# Altium PCB PCB1.PcbDoc (part 2 of 2)
Units mm, origin at the board's own origin, x right, y up, seen from the top; angles counter-clockwise.
Board outline 100 x 100 mm, 2 copper layers (Top Layer, Bottom Layer); 16 components, 62 nets, 154 pads, 23 vias.
Unrouted connection lines stored in the file: 17.
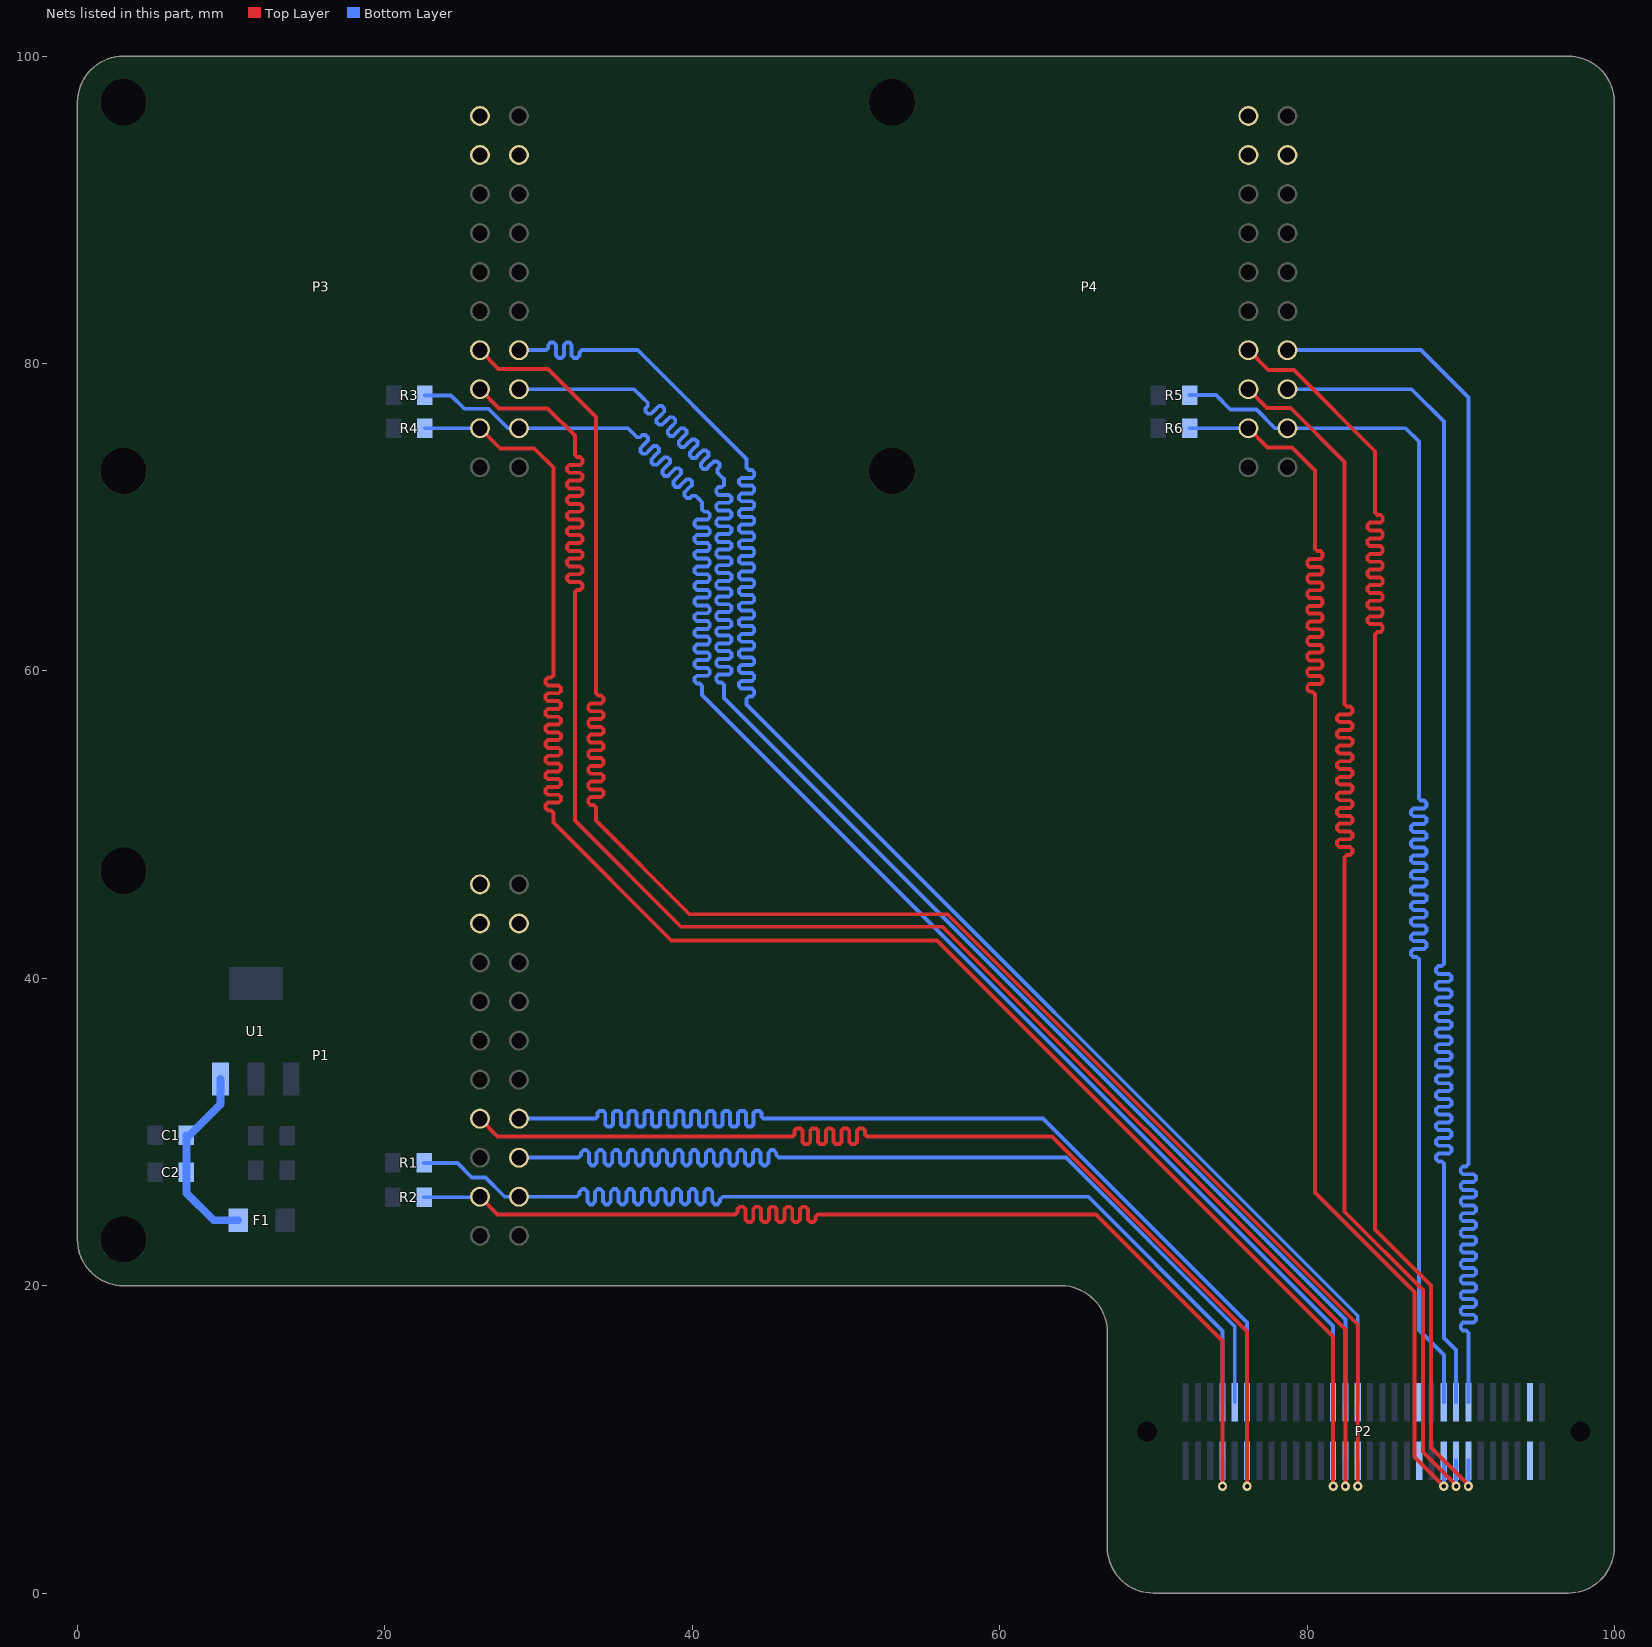
[diagram p2: the nets of this part, all layers, seen from the top]

## Via types
v1: diameter 0.6, hole 0.3, Top Layer to Bottom Layer, 21 vias
v2: diameter 3, hole 3, Top Layer to Bottom Layer, 2 vias

## Nets (pads, with @x,y where several pads share a name; then routed paths per layer and width w, separated by ;. In a path a pad name is that pad's centre, name@x,y a point inside that pad or via, vN(x,y) a via of type N, cw(c..) or ccw(c..) an arc to the next point about the centre after c; other vN are vias at no path point) (continued)
HS_2: P2.28 P3.6 | length 122
  Top Layer w0.254: P3.6@26.187,78.331 27.43,77.089 30.582,77.089 32.36,75.311 32.36,74.168 32.36,74.066 32.512,73.914 32.707,73.914 32.86,73.762 32.86,73.558 32.707,73.406 32.36,73.406 32.012,73.406 31.86,73.254 31.86,73.05 32.012,72.898 32.36,72.898 32.707,72.898 32.86,72.746 32.86,72.542 32.707,72.39 32.36,72.39 32.012,72.39 31.86,72.238 31.86,72.034 32.012,71.882 32.36,71.882 32.707,71.882 32.86,71.73 32.86,71.526 32.707,71.374 32.36,71.374 32.012,71.374 31.86,71.222 31.86,71.018 32.012,70.866 32.36,70.866 32.707,70.866 32.86,70.714 32.86,70.51 32.707,70.358 32.36,70.358 32.012,70.358 31.86,70.206 31.86,70.002 32.012,69.85 32.36,69.85 32.707,69.85 32.86,69.698 32.86,69.494 32.707,69.342 32.36,69.342 32.012,69.342 31.86,69.19 31.86,68.986 32.012,68.834 32.36,68.834 32.707,68.834 32.86,68.682 32.86,68.478 32.707,68.326 32.36,68.326 32.012,68.326 31.86,68.174 31.86,67.97 32.012,67.818 32.36,67.818 32.707,67.818 32.86,67.666 32.86,67.462 32.707,67.31 32.36,67.31 32.012,67.31 31.86,67.158 31.86,66.954 32.012,66.802 32.36,66.802 32.707,66.802 32.86,66.65 32.86,66.446 32.707,66.294 32.36,66.294 32.012,66.294 31.86,66.142 31.86,65.938 32.012,65.786 32.36,65.786 32.707,65.786 32.86,65.634 32.86,65.43 32.707,65.278 32.512,65.278 32.36,65.126 32.36,60.249 32.36,50.267 39.268,43.358 56.286,43.358 82.5,17.144 v1(82.5,6.948)
  Bottom Layer w0.254: v1(82.5,6.948) P2.28@82.5,8.625
HS_3: P2.46 P4.6 | length 95
  Top Layer w0.254: P4.6@76.187,78.331 77.404,77.114 78.943,77.114 82.448,73.609 82.448,57.937 82.448,57.836 82.601,57.683 82.796,57.683 82.948,57.531 82.948,57.328 82.796,57.175 82.448,57.175 82.101,57.175 81.948,57.023 81.948,56.82 82.101,56.667 82.448,56.667 82.796,56.667 82.948,56.515 82.948,56.312 82.796,56.159 82.448,56.159 82.101,56.159 81.948,56.007 81.948,55.804 82.101,55.651 82.448,55.651 82.796,55.651 82.948,55.499 82.948,55.296 82.796,55.143 82.448,55.143 82.101,55.143 81.948,54.991 81.948,54.788 82.101,54.635 82.448,54.635 82.796,54.635 82.948,54.483 82.948,54.28 82.796,54.127 82.448,54.127 82.101,54.127 81.948,53.975 81.948,53.772 82.101,53.619 82.448,53.619 82.796,53.619 82.948,53.467 82.948,53.264 82.796,53.111 82.448,53.111 82.101,53.111 81.948,52.959 81.948,52.756 82.101,52.603 82.448,52.603 82.796,52.603 82.948,52.451 82.948,52.248 82.796,52.095 82.448,52.095 82.101,52.095 81.948,51.943 81.948,51.74 82.101,51.587 82.448,51.587 82.796,51.587 82.948,51.435 82.948,51.232 82.796,51.079 82.448,51.079 82.101,51.079 81.948,50.927 81.948,50.724 82.101,50.571 82.448,50.571 82.796,50.571 82.948,50.419 82.948,50.216 82.796,50.063 82.448,50.063 82.101,50.063 81.948,49.911 81.948,49.708 82.101,49.555 82.448,49.555 82.796,49.555 82.948,49.403 82.948,49.2 82.796,49.047 82.448,49.047 82.101,49.047 81.948,48.895 81.948,48.692 82.101,48.539 82.448,48.539 82.796,48.539 82.948,48.387 82.948,48.184 82.796,48.031 82.601,48.031 82.448,47.879 82.448,41.732 82.448,24.816 87.554,19.71 87.554,9.181 89.7,7.035 v1(89.7,6.948)
  Bottom Layer w0.254: v1(89.7,6.948) 89.7,7.17 P2.46@89.7,8.625
NetC1_1: C1.1 C2.2 F1.2 U1.3 | length 12.6
  Bottom Layer w0.508: U1.3@9.308,33.451 9.308,31.812 7.29,29.794 C1.1@7.087,29.794 C2.2@7.087,27.381 7.087,26.035 8.865,24.257 F1.2@10.465,24.257
PCLK_1: P1.7 P2.11 | length 75.8
  Bottom Layer w0.254: P1.7@28.727,30.871 33.579,30.871 33.706,30.871 33.833,30.998 33.833,31.244 33.96,31.371 34.214,31.371 34.341,31.244 34.341,30.871 34.341,30.498 34.468,30.371 34.722,30.371 34.849,30.498 34.849,30.871 34.849,31.244 34.976,31.371 35.23,31.371 35.357,31.244 35.357,30.871 35.357,30.498 35.484,30.371 35.738,30.371 35.865,30.498 35.865,30.871 35.865,31.244 35.992,31.371 36.246,31.371 36.373,31.244 36.373,30.871 36.373,30.498 36.5,30.371 36.754,30.371 36.881,30.498 36.881,30.871 36.881,31.244 37.008,31.371 37.262,31.371 37.389,31.244 37.389,30.871 37.389,30.498 37.516,30.371 37.77,30.371 37.897,30.498 37.897,30.871 37.897,31.244 38.024,31.371 38.278,31.371 38.405,31.244 38.405,30.871 38.405,30.498 38.532,30.371 38.786,30.371 38.913,30.498 38.913,30.871 38.913,31.244 39.04,31.371 39.294,31.371 39.421,31.244 39.421,30.871 39.421,30.498 39.548,30.371 39.802,30.371 39.929,30.498 39.929,30.871 39.929,31.244 40.056,31.371 40.31,31.371 40.437,31.244 40.437,30.871 40.437,30.498 40.564,30.371 40.818,30.371 40.945,30.498 40.945,30.871 40.945,31.244 41.072,31.371 41.326,31.371 41.453,31.244 41.453,30.871 41.453,30.498 41.58,30.371 41.834,30.371 41.961,30.498 41.961,30.871 41.961,31.244 42.088,31.371 42.342,31.371 42.469,31.244 42.469,30.871 42.469,30.498 42.596,30.371 42.85,30.371 42.977,30.498 42.977,30.871 42.977,31.244 43.104,31.371 43.358,31.371 43.485,31.244 43.485,30.871 43.485,30.498 43.612,30.371 43.866,30.371 43.993,30.498 43.993,30.871 43.993,31.244 44.12,31.371 44.374,31.371 44.501,31.244 44.501,30.998 44.628,30.871 47.244,30.871 62.829,30.871 76.1,17.601 P2.11@76.1,12.425
PCLK_2: P2.29 P3.7 | length 122.3
  Bottom Layer w0.254: P3.7@28.727,80.871 30.378,80.871 30.48,80.871 30.632,81.024 30.632,81.219 30.785,81.371 30.988,81.371 31.14,81.219 31.14,80.871 31.14,80.524 31.293,80.371 31.496,80.371 31.648,80.524 31.648,80.871 31.648,81.219 31.801,81.371 32.004,81.371 32.156,81.219 32.156,80.871 32.156,80.524 32.309,80.371 32.512,80.371 32.664,80.524 32.664,80.719 32.817,80.871 35.154,80.871 36.451,80.871 43.536,73.787 43.536,73.33 43.536,73.228 43.688,73.076 43.883,73.076 44.036,72.923 44.036,72.72 43.883,72.568 43.536,72.568 43.188,72.568 43.036,72.415 43.036,72.212 43.188,72.06 43.536,72.06 43.883,72.06 44.036,71.907 44.036,71.704 43.883,71.552 43.536,71.552 43.188,71.552 43.036,71.399 43.036,71.196 43.188,71.044 43.536,71.044 43.883,71.044 44.036,70.891 44.036,70.688 43.883,70.536 43.536,70.536 43.188,70.536 43.036,70.383 43.036,70.18 43.188,70.028 43.536,70.028 43.883,70.028 44.036,69.875 44.036,69.672 43.883,69.52 43.536,69.52 43.188,69.52 43.036,69.367 43.036,69.164 43.188,69.012 43.536,69.012 43.883,69.012 44.036,68.859 44.036,68.656 43.883,68.504 43.536,68.504 43.188,68.504 43.036,68.351 43.036,68.148 43.188,67.996 43.536,67.996 43.883,67.996 44.036,67.843 44.036,67.64 43.883,67.488 43.536,67.488 43.188,67.488 43.036,67.335 43.036,67.132 43.188,66.98 43.536,66.98 43.883,66.98 44.036,66.827 44.036,66.624 43.883,66.472 43.536,66.472 43.188,66.472 43.036,66.319 43.036,66.116 43.188,65.964 43.536,65.964 43.883,65.964 44.036,65.811 44.036,65.608 43.883,65.456 43.536,65.456 43.188,65.456 43.036,65.303 43.036,65.1 43.188,64.948 43.536,64.948 43.883,64.948 44.036,64.795 44.036,64.592 43.883,64.44 43.536,64.44 43.188,64.44 43.036,64.287 43.036,64.084 43.188,63.932 43.536,63.932 43.883,63.932 44.036,63.779 44.036,63.576 43.883,63.424 43.536,63.424 43.188,63.424 43.036,63.271 43.036,63.068 43.188,62.916 43.536,62.916 43.883,62.916 44.036,62.763 44.036,62.56 43.883,62.408 43.536,62.408 43.188,62.408 43.036,62.255 43.036,62.052 43.188,61.9 43.536,61.9 43.883,61.9 44.036,61.747 44.036,61.544 43.883,61.392 43.536,61.392 43.188,61.392 43.036,61.239 43.036,61.036 43.188,60.884 43.536,60.884 43.883,60.884 44.036,60.731 44.036,60.528 43.883,60.376 43.536,60.376 43.188,60.376 43.036,60.223 43.036,60.02 43.188,59.868 43.536,59.868 43.883,59.868 44.036,59.715 44.036,59.512 43.883,59.36 43.536,59.36 43.188,59.36 43.036,59.207 43.036,59.004 43.188,58.852 43.536,58.852 43.883,58.852 44.036,58.699 44.036,58.496 43.883,58.344 43.688,58.344 43.536,58.191 43.536,57.836 43.536,57.81 43.715,57.631 43.878,57.468 83.3,18.046 P2.29@83.3,12.425
PCLK_3: P2.47 P4.7 | length 95.5
  Bottom Layer w0.254: P4.7@78.727,80.871 87.429,80.871 90.5,77.8 90.5,28.702 90.5,27.915 90.348,27.762 90.152,27.762 90,27.61 90,27.407 90.152,27.254 90.5,27.254 90.848,27.254 91,27.102 91,26.899 90.848,26.746 90.5,26.746 90.152,26.746 90,26.594 90,26.391 90.152,26.238 90.5,26.238 90.848,26.238 91,26.086 91,25.883 90.848,25.73 90.5,25.73 90.152,25.73 90,25.578 90,25.375 90.152,25.222 90.5,25.222 90.848,25.222 91,25.07 91,24.867 90.848,24.714 90.5,24.714 90.152,24.714 90,24.562 90,24.359 90.152,24.206 90.5,24.206 90.848,24.206 91,24.054 91,23.851 90.848,23.698 90.5,23.698 90.152,23.698 90,23.546 90,23.343 90.152,23.19 90.5,23.19 90.848,23.19 91,23.038 91,22.835 90.848,22.682 90.5,22.682 90.152,22.682 90,22.53 90,22.327 90.152,22.174 90.5,22.174 90.848,22.174 91,22.022 91,21.819 90.848,21.666 90.5,21.666 90.152,21.666 90,21.514 90,21.311 90.152,21.158 90.5,21.158 90.848,21.158 91,21.006 91,20.803 90.848,20.65 90.5,20.65 90.152,20.65 90,20.498 90,20.295 90.152,20.142 90.5,20.142 90.848,20.142 91,19.99 91,19.787 90.848,19.634 90.5,19.634 90.152,19.634 90,19.482 90,19.279 90.152,19.126 90.5,19.126 90.848,19.126 91,18.974 91,18.771 90.848,18.618 90.5,18.618 90.152,18.618 90,18.466 90,18.263 90.152,18.11 90.5,18.11 90.848,18.11 91,17.958 91,17.755 90.848,17.602 90.5,17.602 90.152,17.602 90,17.45 90,17.247 90.152,17.094 90.348,17.094 90.5,16.942 90.5,16.84 P2.47@90.5,12.425
PWDN_1: P1.18
PWDN_2: P3.18
PWDN_3: P4.18
RST_1: P1.17
RST_2: P3.17
RST_3: P4.17
SCK_1: P1.3 P2.7 R1.2 | length 75.2
  Bottom Layer w0.254: R1.2@22.555,27.991 24.714,27.991 25.654,27.051 26.543,27.051 27.803,25.791 P1.3@28.727,25.791 32.41,25.791 32.487,25.791 32.664,25.969 32.664,26.113 32.842,26.291 32.995,26.291 33.172,26.113 33.172,25.791 33.172,25.469 33.35,25.291 33.503,25.291 33.68,25.469 33.68,25.791 33.68,26.113 33.858,26.291 34.011,26.291 34.188,26.113 34.188,25.791 34.188,25.469 34.366,25.291 34.519,25.291 34.696,25.469 34.696,25.791 34.696,26.113 34.874,26.291 35.027,26.291 35.204,26.113 35.204,25.791 35.204,25.469 35.382,25.291 35.535,25.291 35.712,25.469 35.712,25.791 35.712,26.113 35.89,26.291 36.043,26.291 36.22,26.113 36.22,25.791 36.22,25.469 36.398,25.291 36.551,25.291 36.728,25.469 36.728,25.791 36.728,26.113 36.906,26.291 37.059,26.291 37.236,26.113 37.236,25.791 37.236,25.469 37.414,25.291 37.567,25.291 37.744,25.469 37.744,25.791 37.744,26.113 37.922,26.291 38.075,26.291 38.252,26.113 38.252,25.791 38.252,25.469 38.43,25.291 38.583,25.291 38.76,25.469 38.76,25.791 38.76,26.113 38.938,26.291 39.091,26.291 39.268,26.113 39.268,25.791 39.268,25.469 39.446,25.291 39.599,25.291 39.776,25.469 39.776,25.791 39.776,26.113 39.954,26.291 40.107,26.291 40.284,26.113 40.284,25.791 40.284,25.469 40.462,25.291 40.615,25.291 40.792,25.469 40.792,25.791 40.792,26.113 40.97,26.291 41.123,26.291 41.3,26.113 41.3,25.791 41.3,25.469 41.478,25.291 41.631,25.291 41.808,25.469 41.808,25.613 41.986,25.791 44.983,25.791 65.776,25.791 74.5,17.067 P2.7@74.5,12.425
SCK_2: P2.25 P3.3 R3.2 | length 122.4
  Bottom Layer w0.254: R3.2@22.606,77.927 24.308,77.927 25.171,77.064 26.746,77.064 28.019,75.791 P3.3@28.727,75.791 35.816,75.791 36.401,75.206 36.617,75.206 36.755,75.344 36.97,75.344 37.114,75.201 37.114,74.985 36.868,74.739 36.622,74.494 36.622,74.278 36.766,74.134 36.982,74.134 37.228,74.38 37.473,74.626 37.689,74.626 37.833,74.482 37.833,74.267 37.587,74.021 37.341,73.775 37.341,73.56 37.485,73.416 37.7,73.416 37.946,73.662 38.192,73.907 38.407,73.907 38.551,73.764 38.551,73.548 38.305,73.302 38.059,73.057 38.059,72.841 38.203,72.697 38.419,72.697 38.664,72.943 38.91,73.189 39.126,73.189 39.269,73.045 39.269,72.83 39.024,72.584 38.778,72.338 38.778,72.123 38.921,71.979 39.137,71.979 39.383,72.225 39.629,72.471 39.844,72.471 39.988,72.327 39.988,72.111 39.742,71.866 39.496,71.62 39.496,71.404 39.64,71.261 39.855,71.261 39.993,71.399 40.209,71.399 40.46,71.147 40.64,70.968 40.64,70.866 40.64,70.51 40.792,70.358 40.988,70.358 41.14,70.206 41.14,70.002 40.988,69.85 40.64,69.85 40.292,69.85 40.14,69.698 40.14,69.494 40.292,69.342 40.64,69.342 40.988,69.342 41.14,69.19 41.14,68.986 40.988,68.834 40.64,68.834 40.292,68.834 40.14,68.682 40.14,68.478 40.292,68.326 40.64,68.326 40.988,68.326 41.14,68.174 41.14,67.97 40.988,67.818 40.64,67.818 40.292,67.818 40.14,67.666 40.14,67.462 40.292,67.31 40.64,67.31 40.988,67.31 41.14,67.158 41.14,66.954 40.988,66.802 40.64,66.802 40.292,66.802 40.14,66.65 40.14,66.446 40.292,66.294 40.64,66.294 40.988,66.294 41.14,66.142 41.14,65.938 40.988,65.786 40.64,65.786 40.292,65.786 40.14,65.634 40.14,65.43 40.292,65.278 40.64,65.278 40.988,65.278 41.14,65.126 41.14,64.922 40.988,64.77 40.64,64.77 40.292,64.77 40.14,64.618 40.14,64.414 40.292,64.262 40.64,64.262 40.988,64.262 41.14,64.11 41.14,63.906 40.988,63.754 40.64,63.754 40.292,63.754 40.14,63.602 40.14,63.398 40.292,63.246 40.64,63.246 40.988,63.246 41.14,63.094 41.14,62.89 40.988,62.738 40.64,62.738 40.292,62.738 40.14,62.586 40.14,62.382 40.292,62.23 40.64,62.23 40.988,62.23 41.14,62.078 41.14,61.874 40.988,61.722 40.64,61.722 40.292,61.722 40.14,61.57 40.14,61.366 40.292,61.214 40.64,61.214 40.988,61.214 41.14,61.062 41.14,60.858 40.988,60.706 40.64,60.706 40.292,60.706 40.14,60.554 40.14,60.35 40.292,60.198 40.64,60.198 40.988,60.198 41.14,60.046 41.14,59.842 40.988,59.69 40.64,59.69 40.292,59.69 40.14,59.538 40.14,59.334 40.292,59.182 40.488,59.182 40.64,59.03 40.64,58.928 40.64,58.445 81.7,17.385 P2.25@81.7,12.425
SCK_3: P2.43 P4.3 R5.2 | length 95.6
  Bottom Layer w0.254: R5.2@72.365,77.953 74.066,77.953 75.006,77.013 76.708,77.013 77.93,75.791 P4.3@78.727,75.791 86.413,75.791 87.274,74.93 87.274,54.331 87.274,51.714 87.427,51.562 87.622,51.562 87.774,51.41 87.774,51.206 87.622,51.054 87.274,51.054 86.927,51.054 86.774,50.902 86.774,50.698 86.927,50.546 87.274,50.546 87.622,50.546 87.774,50.394 87.774,50.19 87.622,50.038 87.274,50.038 86.927,50.038 86.774,49.886 86.774,49.682 86.927,49.53 87.274,49.53 87.622,49.53 87.774,49.378 87.774,49.174 87.622,49.022 87.274,49.022 86.927,49.022 86.774,48.87 86.774,48.666 86.927,48.514 87.274,48.514 87.622,48.514 87.774,48.362 87.774,48.158 87.622,48.006 87.274,48.006 86.927,48.006 86.774,47.854 86.774,47.65 86.927,47.498 87.274,47.498 87.622,47.498 87.774,47.346 87.774,47.142 87.622,46.99 87.274,46.99 86.927,46.99 86.774,46.838 86.774,46.634 86.927,46.482 87.274,46.482 87.622,46.482 87.774,46.33 87.774,46.126 87.622,45.974 87.274,45.974 86.927,45.974 86.774,45.822 86.774,45.618 86.927,45.466 87.274,45.466 87.622,45.466 87.774,45.314 87.774,45.11 87.622,44.958 87.274,44.958 86.927,44.958 86.774,44.806 86.774,44.602 86.927,44.45 87.274,44.45 87.622,44.45 87.774,44.298 87.774,44.094 87.622,43.942 87.274,43.942 86.927,43.942 86.774,43.79 86.774,43.586 86.927,43.434 87.274,43.434 87.622,43.434 87.774,43.282 87.774,43.078 87.622,42.926 87.274,42.926 86.927,42.926 86.774,42.774 86.774,42.57 86.927,42.418 87.274,42.418 87.622,42.418 87.774,42.266 87.774,42.062 87.622,41.91 87.274,41.91 86.927,41.91 86.774,41.758 86.774,41.554 86.927,41.402 87.122,41.402 87.274,41.25 87.274,41.148 87.274,17.12 88.9,15.494 P2.43@88.9,12.425
SDA_1: P1.4 P2.8 R2.2 | length 75
  Top Layer w0.254: P1.4@26.187,25.791 27.341,24.638 42.697,24.638 42.799,24.638 42.951,24.79 42.951,24.986 43.104,25.138 43.307,25.138 43.459,24.986 43.459,24.638 43.459,24.29 43.612,24.138 43.815,24.138 43.967,24.29 43.967,24.638 43.967,24.986 44.12,25.138 44.323,25.138 44.475,24.986 44.475,24.638 44.475,24.29 44.628,24.138 44.831,24.138 44.983,24.29 44.983,24.638 44.983,24.986 45.136,25.138 45.339,25.138 45.491,24.986 45.491,24.638 45.491,24.29 45.644,24.138 45.847,24.138 45.999,24.29 45.999,24.638 45.999,24.986 46.152,25.138 46.355,25.138 46.507,24.986 46.507,24.638 46.507,24.29 46.66,24.138 46.863,24.138 47.015,24.29 47.015,24.638 47.015,24.986 47.168,25.138 47.371,25.138 47.523,24.986 47.523,24.638 47.523,24.29 47.676,24.138 47.879,24.138 48.031,24.29 48.031,24.486 48.184,24.638 52.502,24.638 66.269,24.638 74.5,16.407 v1(74.5,6.948)
  Bottom Layer w0.254: R2.2@22.555,25.756 P1.4@26.152,25.756 ; v1(74.5,6.948) 74.5,7.17 P2.8@74.5,8.625
SDA_2: P2.26 P3.4 R4.2 | length 122.3
  Top Layer w0.254: P3.4@26.187,75.791 27.506,74.473 29.718,74.473 30.963,73.228 30.963,66.675 30.963,59.715 30.81,59.563 30.615,59.563 30.463,59.411 30.463,59.207 30.615,59.055 30.963,59.055 31.31,59.055 31.463,58.903 31.463,58.699 31.31,58.547 30.963,58.547 30.615,58.547 30.463,58.395 30.463,58.191 30.615,58.039 30.963,58.039 31.31,58.039 31.463,57.887 31.463,57.683 31.31,57.531 30.963,57.531 30.615,57.531 30.463,57.379 30.463,57.175 30.615,57.023 30.963,57.023 31.31,57.023 31.463,56.871 31.463,56.667 31.31,56.515 30.963,56.515 30.615,56.515 30.463,56.363 30.463,56.159 30.615,56.007 30.963,56.007 31.31,56.007 31.463,55.855 31.463,55.651 31.31,55.499 30.963,55.499 30.615,55.499 30.463,55.347 30.463,55.143 30.615,54.991 30.963,54.991 31.31,54.991 31.463,54.839 31.463,54.635 31.31,54.483 30.963,54.483 30.615,54.483 30.463,54.331 30.463,54.127 30.615,53.975 30.963,53.975 31.31,53.975 31.463,53.823 31.463,53.619 31.31,53.467 30.963,53.467 30.615,53.467 30.463,53.315 30.463,53.111 30.615,52.959 30.963,52.959 31.31,52.959 31.463,52.807 31.463,52.603 31.31,52.451 30.963,52.451 30.615,52.451 30.463,52.299 30.463,52.095 30.615,51.943 30.963,51.943 31.31,51.943 31.463,51.791 31.463,51.587 31.31,51.435 30.963,51.435 30.615,51.435 30.463,51.283 30.463,51.079 30.615,50.927 30.81,50.927 30.963,50.775 30.963,50.673 30.963,50.14 38.633,42.469 55.931,42.469 81.7,16.7 v1(81.7,6.948)
  Bottom Layer w0.254: R4.2@22.606,75.794 P3.4@26.185,75.794 ; v1(81.7,6.948) 81.7,7.17 P2.26@81.7,8.625
SDA_3: P2.44 P4.4 R6.2 | length 95.1
  Top Layer w0.254: P4.4@76.187,75.791 77.43,74.549 79.019,74.549 80.518,73.05 80.518,68.047 80.518,67.945 80.67,67.793 80.866,67.793 81.018,67.64 81.018,67.437 80.866,67.285 80.518,67.285 80.17,67.285 80.018,67.132 80.018,66.929 80.17,66.777 80.518,66.777 80.866,66.777 81.018,66.624 81.018,66.421 80.866,66.269 80.518,66.269 80.17,66.269 80.018,66.116 80.018,65.913 80.17,65.761 80.518,65.761 80.866,65.761 81.018,65.608 81.018,65.405 80.866,65.253 80.518,65.253 80.17,65.253 80.018,65.1 80.018,64.897 80.17,64.745 80.518,64.745 80.866,64.745 81.018,64.592 81.018,64.389 80.866,64.237 80.518,64.237 80.17,64.237 80.018,64.084 80.018,63.881 80.17,63.729 80.518,63.729 80.866,63.729 81.018,63.576 81.018,63.373 80.866,63.221 80.518,63.221 80.17,63.221 80.018,63.068 80.018,62.865 80.17,62.713 80.518,62.713 80.866,62.713 81.018,62.56 81.018,62.357 80.866,62.205 80.518,62.205 80.17,62.205 80.018,62.052 80.018,61.849 80.17,61.697 80.518,61.697 80.866,61.697 81.018,61.544 81.018,61.341 80.866,61.189 80.518,61.189 80.17,61.189 80.018,61.036 80.018,60.833 80.17,60.681 80.518,60.681 80.866,60.681 81.018,60.528 81.018,60.325 80.866,60.173 80.518,60.173 80.17,60.173 80.018,60.02 80.018,59.817 80.17,59.665 80.518,59.665 80.866,59.665 81.018,59.512 81.018,59.309 80.866,59.157 80.518,59.157 80.17,59.157 80.018,59.004 80.018,58.801 80.17,58.649 80.366,58.649 80.518,58.496 80.518,52.248 80.518,26.06 86.995,19.583 86.995,8.853 v1(88.9,6.948)
  Bottom Layer w0.254: R6.2@72.365,75.794 76.185,75.794 P4.4@76.187,75.791 ; v1(88.9,6.948) 88.9,7.17 P2.44@88.9,8.625
STRO_1: P1.20
STRO_2: P3.20
STRO_3: P4.20
T10: P2.58
T11: P2.57
V16: P2.39
VS_1: P1.5 P2.9 | length 75.6
  Bottom Layer w0.254: P1.5@28.727,28.331 32.512,28.331 32.588,28.331 32.766,28.509 32.766,28.653 32.944,28.831 33.096,28.831 33.274,28.653 33.274,28.331 33.274,28.009 33.452,27.831 33.604,27.831 33.782,28.009 33.782,28.331 33.782,28.653 33.96,28.831 34.112,28.831 34.29,28.653 34.29,28.331 34.29,28.009 34.468,27.831 34.62,27.831 34.798,28.009 34.798,28.331 34.798,28.653 34.976,28.831 35.128,28.831 35.306,28.653 35.306,28.331 35.306,28.009 35.484,27.831 35.636,27.831 35.814,28.009 35.814,28.331 35.814,28.653 35.992,28.831 36.144,28.831 36.322,28.653 36.322,28.331 36.322,28.009 36.5,27.831 36.652,27.831 36.83,28.009 36.83,28.331 36.83,28.653 37.008,28.831 37.16,28.831 37.338,28.653 37.338,28.331 37.338,28.009 37.516,27.831 37.668,27.831 37.846,28.009 37.846,28.331 37.846,28.653 38.024,28.831 38.176,28.831 38.354,28.653 38.354,28.331 38.354,28.009 38.532,27.831 38.684,27.831 38.862,28.009 38.862,28.331 38.862,28.653 39.04,28.831 39.192,28.831 39.37,28.653 39.37,28.331 39.37,28.009 39.548,27.831 39.7,27.831 39.878,28.009 39.878,28.331 39.878,28.653 40.056,28.831 40.208,28.831 40.386,28.653 40.386,28.331 40.386,28.009 40.564,27.831 40.716,27.831 40.894,28.009 40.894,28.331 40.894,28.653 41.072,28.831 41.224,28.831 41.402,28.653 41.402,28.331 41.402,28.009 41.58,27.831 41.732,27.831 41.91,28.009 41.91,28.331 41.91,28.653 42.088,28.831 42.24,28.831 42.418,28.653 42.418,28.331 42.418,28.009 42.596,27.831 42.748,27.831 42.926,28.009 42.926,28.331 42.926,28.653 43.104,28.831 43.256,28.831 43.434,28.653 43.434,28.331 43.434,28.009 43.612,27.831 43.764,27.831 43.942,28.009 43.942,28.331 43.942,28.653 44.12,28.831 44.272,28.831 44.45,28.653 44.45,28.331 44.45,28.009 44.628,27.831 44.78,27.831 44.958,28.009 44.958,28.331 44.958,28.653 45.136,28.831 45.288,28.831 45.466,28.653 45.466,28.509 45.644,28.331 46.558,28.331 64.328,28.331 75.3,17.359 P2.9@75.3,12.425
VS_2: P2.27 P3.5 | length 122.6
  Bottom Layer w0.254: P3.5@28.727,78.331 36.223,78.331 36.741,77.813 37.105,77.449 37.105,77.233 36.967,77.095 36.967,76.88 37.111,76.736 37.326,76.736 37.572,76.982 37.818,77.228 38.034,77.228 38.177,77.084 38.177,76.868 37.931,76.623 37.686,76.377 37.686,76.161 37.829,76.018 38.045,76.018 38.291,76.263 38.536,76.509 38.752,76.509 38.896,76.365 38.896,76.15 38.65,75.904 38.404,75.658 38.404,75.443 38.548,75.299 38.763,75.299 39.009,75.545 39.255,75.791 39.47,75.791 39.614,75.647 39.614,75.431 39.368,75.186 39.123,74.94 39.123,74.724 39.266,74.581 39.482,74.581 39.728,74.826 39.973,75.072 40.189,75.072 40.333,74.929 40.333,74.713 40.087,74.467 39.841,74.221 39.841,74.006 39.985,73.862 40.2,73.862 40.446,74.108 40.692,74.354 40.907,74.354 41.051,74.21 41.051,73.995 40.805,73.749 40.559,73.503 40.559,73.288 40.703,73.144 40.919,73.144 41.164,73.39 41.41,73.635 41.626,73.635 41.769,73.492 41.769,73.276 41.631,73.138 41.631,72.923 41.883,72.671 42.062,72.492 42.062,72.466 42.062,72.111 41.91,71.958 41.715,71.958 41.562,71.806 41.562,71.603 41.715,71.45 42.062,71.45 42.41,71.45 42.562,71.298 42.562,71.095 42.41,70.942 42.062,70.942 41.715,70.942 41.562,70.79 41.562,70.587 41.715,70.434 42.062,70.434 42.41,70.434 42.562,70.282 42.562,70.079 42.41,69.926 42.062,69.926 41.715,69.926 41.562,69.774 41.562,69.571 41.715,69.418 42.062,69.418 42.41,69.418 42.562,69.266 42.562,69.063 42.41,68.91 42.062,68.91 41.715,68.91 41.562,68.758 41.562,68.555 41.715,68.402 42.062,68.402 42.41,68.402 42.562,68.25 42.562,68.047 42.41,67.894 42.062,67.894 41.715,67.894 41.562,67.742 41.562,67.539 41.715,67.386 42.062,67.386 42.41,67.386 42.562,67.234 42.562,67.031 42.41,66.878 42.062,66.878 41.715,66.878 41.562,66.726 41.562,66.523 41.715,66.37 42.062,66.37 42.41,66.37 42.562,66.218 42.562,66.015 42.41,65.862 42.062,65.862 41.715,65.862 41.562,65.71 41.562,65.507 41.715,65.354 42.062,65.354 42.41,65.354 42.562,65.202 42.562,64.999 42.41,64.846 42.062,64.846 41.715,64.846 41.562,64.694 41.562,64.491 41.715,64.338 42.062,64.338 42.41,64.338 42.562,64.186 42.562,63.983 42.41,63.83 42.062,63.83 41.715,63.83 41.562,63.678 41.562,63.475 41.715,63.322 42.062,63.322 42.41,63.322 42.562,63.17 42.562,62.967 42.41,62.814 42.062,62.814 41.715,62.814 41.562,62.662 41.562,62.459 41.715,62.306 42.062,62.306 42.41,62.306 42.562,62.154 42.562,61.951 42.41,61.798 42.062,61.798 41.715,61.798 41.562,61.646 41.562,61.443 41.715,61.29 42.062,61.29 42.41,61.29 42.562,61.138 42.562,60.935 42.41,60.782 42.062,60.782 41.715,60.782 41.562,60.63 41.562,60.427 41.715,60.274 42.062,60.274 42.41,60.274 42.562,60.122 42.562,59.919 42.41,59.766 42.062,59.766 41.715,59.766 41.562,59.614 41.562,59.411 41.715,59.258 41.91,59.258 42.062,59.106 42.062,59.004 42.062,58.242 82.5,17.805 P2.27@82.5,12.425
VS_3: P2.45 P4.5 | length 95.5
  Bottom Layer w0.254: P4.5@78.727,78.331 86.794,78.331 88.9,76.225 88.9,42.113 88.9,40.945 88.748,40.792 88.552,40.792 88.4,40.64 88.4,40.437 88.552,40.284 88.9,40.284 89.248,40.284 89.4,40.132 89.4,39.929 89.248,39.776 88.9,39.776 88.552,39.776 88.4,39.624 88.4,39.421 88.552,39.268 88.9,39.268 89.248,39.268 89.4,39.116 89.4,38.913 89.248,38.76 88.9,38.76 88.552,38.76 88.4,38.608 88.4,38.405 88.552,38.252 88.9,38.252 89.248,38.252 89.4,38.1 89.4,37.897 89.248,37.744 88.9,37.744 88.552,37.744 88.4,37.592 88.4,37.389 88.552,37.236 88.9,37.236 89.248,37.236 89.4,37.084 89.4,36.881 89.248,36.728 88.9,36.728 88.552,36.728 88.4,36.576 88.4,36.373 88.552,36.22 88.9,36.22 89.248,36.22 89.4,36.068 89.4,35.865 89.248,35.712 88.9,35.712 88.552,35.712 88.4,35.56 88.4,35.357 88.552,35.204 88.9,35.204 89.248,35.204 89.4,35.052 89.4,34.849 89.248,34.696 88.9,34.696 88.552,34.696 88.4,34.544 88.4,34.341 88.552,34.188 88.9,34.188 89.248,34.188 89.4,34.036 89.4,33.833 89.248,33.68 88.9,33.68 88.552,33.68 88.4,33.528 88.4,33.325 88.552,33.172 88.9,33.172 89.248,33.172 89.4,33.02 89.4,32.817 89.248,32.664 88.9,32.664 88.552,32.664 88.4,32.512 88.4,32.309 88.552,32.156 88.9,32.156 89.248,32.156 89.4,32.004 89.4,31.801 89.248,31.648 88.9,31.648 88.552,31.648 88.4,31.496 88.4,31.293 88.552,31.14 88.9,31.14 89.248,31.14 89.4,30.988 89.4,30.785 89.248,30.632 88.9,30.632 88.552,30.632 88.4,30.48 88.4,30.277 88.552,30.124 88.9,30.124 89.248,30.124 89.4,29.972 89.4,29.769 89.248,29.616 88.9,29.616 88.552,29.616 88.4,29.464 88.4,29.261 88.552,29.108 88.9,29.108 89.248,29.108 89.4,28.956 89.4,28.753 89.248,28.6 88.9,28.6 88.552,28.6 88.4,28.448 88.4,28.245 88.552,28.092 88.748,28.092 88.9,27.94 88.9,27.838 88.9,16.612 89.7,15.812 P2.45@89.7,12.425
W16: P2.40
XCLK_1: P1.8 P2.12 | length 74.9
  Top Layer w0.254: P1.8@26.187,30.871 27.341,29.718 46.406,29.718 46.533,29.718 46.66,29.845 46.66,30.091 46.787,30.218 47.041,30.218 47.168,30.091 47.168,29.718 47.168,29.345 47.295,29.218 47.549,29.218 47.676,29.345 47.676,29.718 47.676,30.091 47.803,30.218 48.057,30.218 48.184,30.091 48.184,29.718 48.184,29.345 48.311,29.218 48.565,29.218 48.692,29.345 48.692,29.718 48.692,30.091 48.819,30.218 49.073,30.218 49.2,30.091 49.2,29.718 49.2,29.345 49.327,29.218 49.581,29.218 49.708,29.345 49.708,29.718 49.708,30.091 49.835,30.218 50.089,30.218 50.216,30.091 50.216,29.718 50.216,29.345 50.343,29.218 50.597,29.218 50.724,29.345 50.724,29.718 50.724,30.091 50.851,30.218 51.105,30.218 51.232,30.091 51.232,29.845 51.359,29.718 56.794,29.718 63.398,29.718 76.1,17.016 v1(76.1,6.948)
  Bottom Layer w0.254: v1(76.1,6.948) 76.1,7.17 P2.12@76.1,8.625
XCLK_2: P2.30 P3.8 | length 122.3
  Top Layer w0.254: P3.8@26.187,80.871 27.404,79.654 30.607,79.654 33.731,76.53 33.731,66.421 33.731,58.547 33.884,58.395 34.079,58.395 34.231,58.242 34.231,58.039 34.079,57.887 33.731,57.887 33.384,57.887 33.231,57.734 33.231,57.531 33.384,57.379 33.731,57.379 34.079,57.379 34.231,57.226 34.231,57.023 34.079,56.871 33.731,56.871 33.384,56.871 33.231,56.718 33.231,56.515 33.384,56.363 33.731,56.363 34.079,56.363 34.231,56.21 34.231,56.007 34.079,55.855 33.731,55.855 33.384,55.855 33.231,55.702 33.231,55.499 33.384,55.347 33.731,55.347 34.079,55.347 34.231,55.194 34.231,54.991 34.079,54.839 33.731,54.839 33.384,54.839 33.231,54.686 33.231,54.483 33.384,54.331 33.731,54.331 34.079,54.331 34.231,54.178 34.231,53.975 34.079,53.823 33.731,53.823 33.384,53.823 33.231,53.67 33.231,53.467 33.384,53.315 33.731,53.315 34.079,53.315 34.231,53.162 34.231,52.959 34.079,52.807 33.731,52.807 33.384,52.807 33.231,52.654 33.231,52.451 33.384,52.299 33.731,52.299 34.079,52.299 34.231,52.146 34.231,51.943 34.079,51.791 33.731,51.791 33.384,51.791 33.231,51.638 33.231,51.435 33.384,51.283 33.579,51.283 33.731,51.13 33.731,51.029 33.731,50.267 39.827,44.171 56.617,44.171 83.3,17.487 v1(83.3,6.948)
  Bottom Layer w0.254: v1(83.3,6.948) 83.3,7.17 P2.30@83.3,8.625
XCLK_3: P2.48 P4.8 | length 94.6
  Top Layer w0.254: P4.8@76.187,80.871 77.48,79.578 79.146,79.578 84.43,74.295 84.43,70.409 84.43,70.307 84.582,70.155 84.777,70.155 84.93,70.002 84.93,69.799 84.777,69.647 84.43,69.647 84.082,69.647 83.93,69.494 83.93,69.291 84.082,69.139 84.43,69.139 84.777,69.139 84.93,68.986 84.93,68.783 84.777,68.631 84.43,68.631 84.082,68.631 83.93,68.478 83.93,68.275 84.082,68.123 84.43,68.123 84.777,68.123 84.93,67.97 84.93,67.767 84.777,67.615 84.43,67.615 84.082,67.615 83.93,67.462 83.93,67.259 84.082,67.107 84.43,67.107 84.777,67.107 84.93,66.954 84.93,66.751 84.777,66.599 84.43,66.599 84.082,66.599 83.93,66.446 83.93,66.243 84.082,66.091 84.43,66.091 84.777,66.091 84.93,65.938 84.93,65.735 84.777,65.583 84.43,65.583 84.082,65.583 83.93,65.43 83.93,65.227 84.082,65.075 84.43,65.075 84.777,65.075 84.93,64.922 84.93,64.719 84.777,64.567 84.43,64.567 84.082,64.567 83.93,64.414 83.93,64.211 84.082,64.059 84.43,64.059 84.777,64.059 84.93,63.906 84.93,63.703 84.777,63.551 84.43,63.551 84.082,63.551 83.93,63.398 83.93,63.195 84.082,63.043 84.43,63.043 84.777,63.043 84.93,62.89 84.93,62.687 84.777,62.535 84.582,62.535 84.43,62.382 84.43,58.09 84.43,23.647 88.062,20.015 88.062,9.473 90.5,7.035 v1(90.5,6.948)
  Bottom Layer w0.254: v1(90.5,6.948) 90.5,7.17 P2.48@90.5,8.625
pads on no net: P1.0 P2.21 P2.22 P2.61 P2.62 P3.0 P4.0 U1.4
copper on no net:
  other v2: 69.6,2.5 97.8,2.5

## Silkscreen, mask and mechanical layers (free items; w line width, h text height)
Mechanical 1:
  the board outline again, w0.254